# Altium PCB mother_noPour.PcbDoc
Units mm, origin at the board's own origin, x right, y up, seen from the top; angles counter-clockwise.
Board outline 232.5 x 170.6 mm, 2 copper layers (Top Layer, Bottom Layer); 95 components, 49 nets, 567 pads, 0 vias.
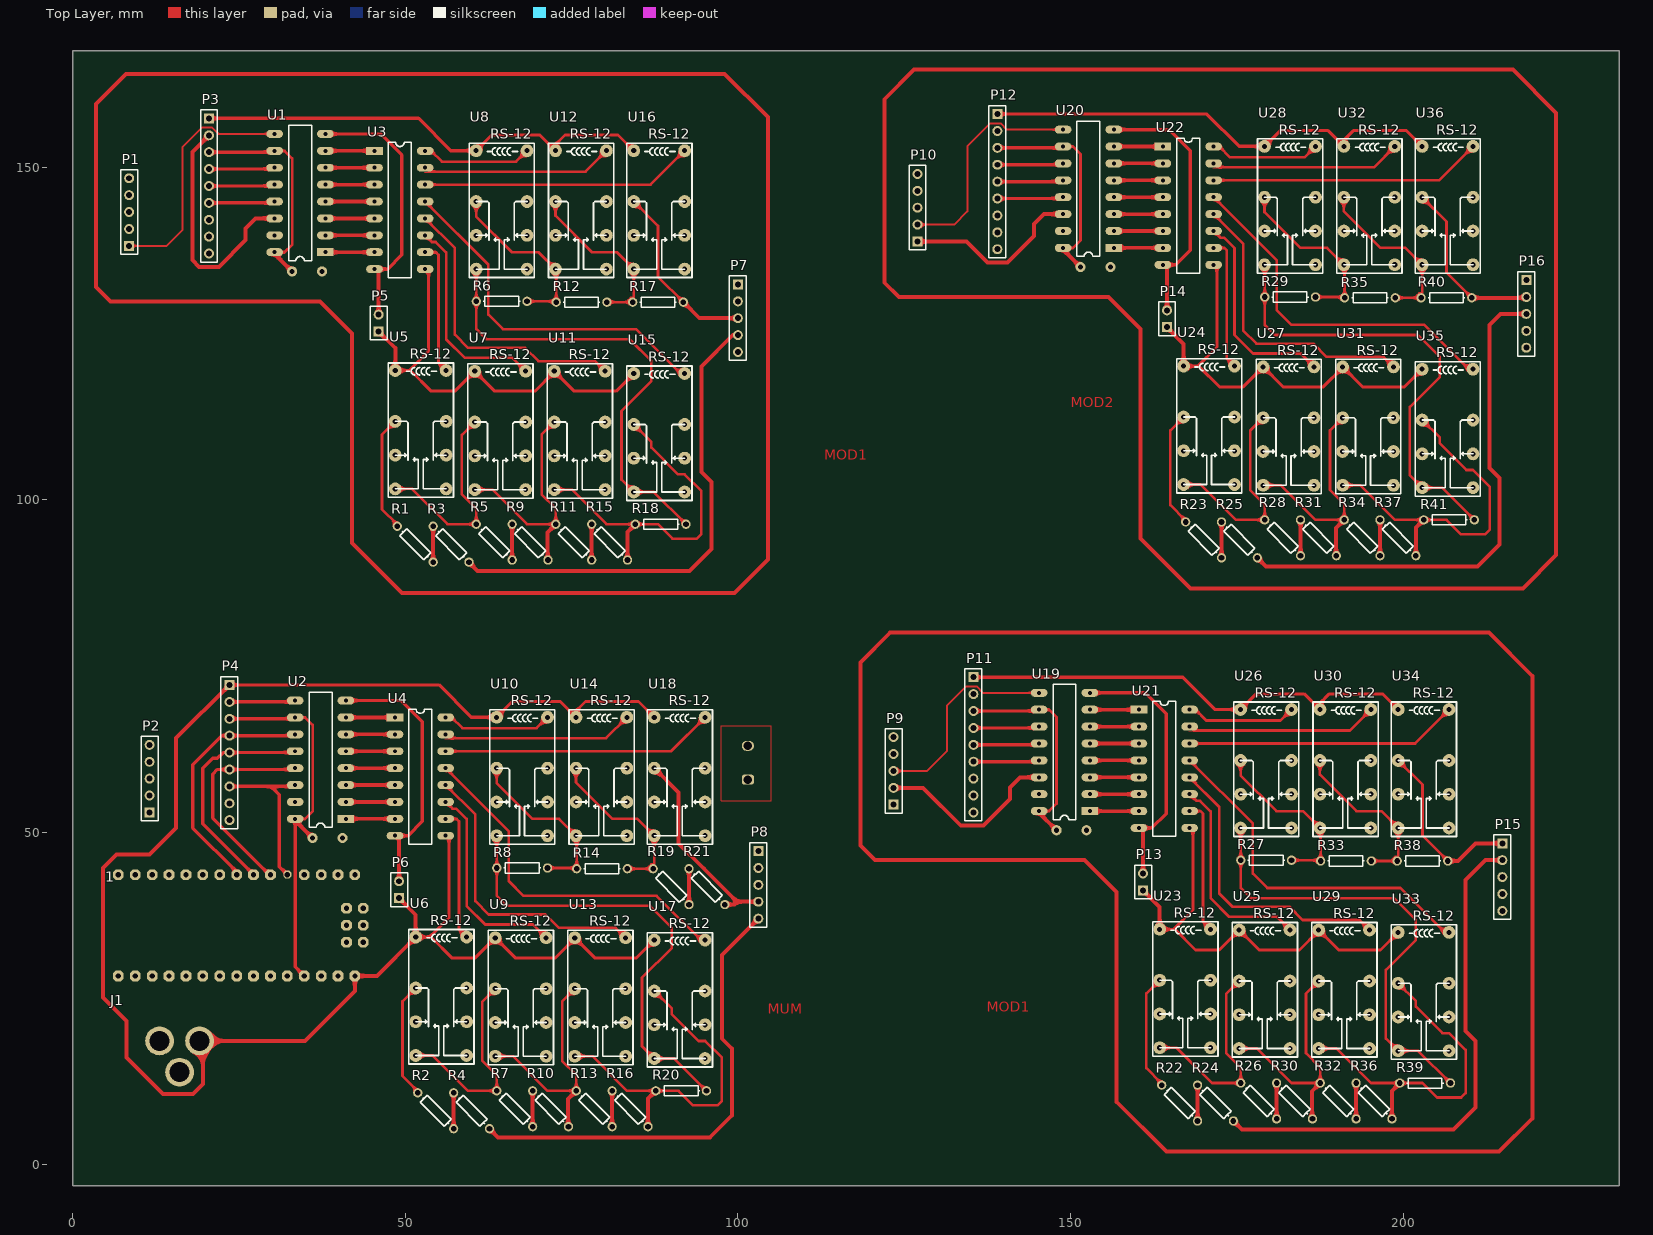
[diagram p0: Top Layer view]
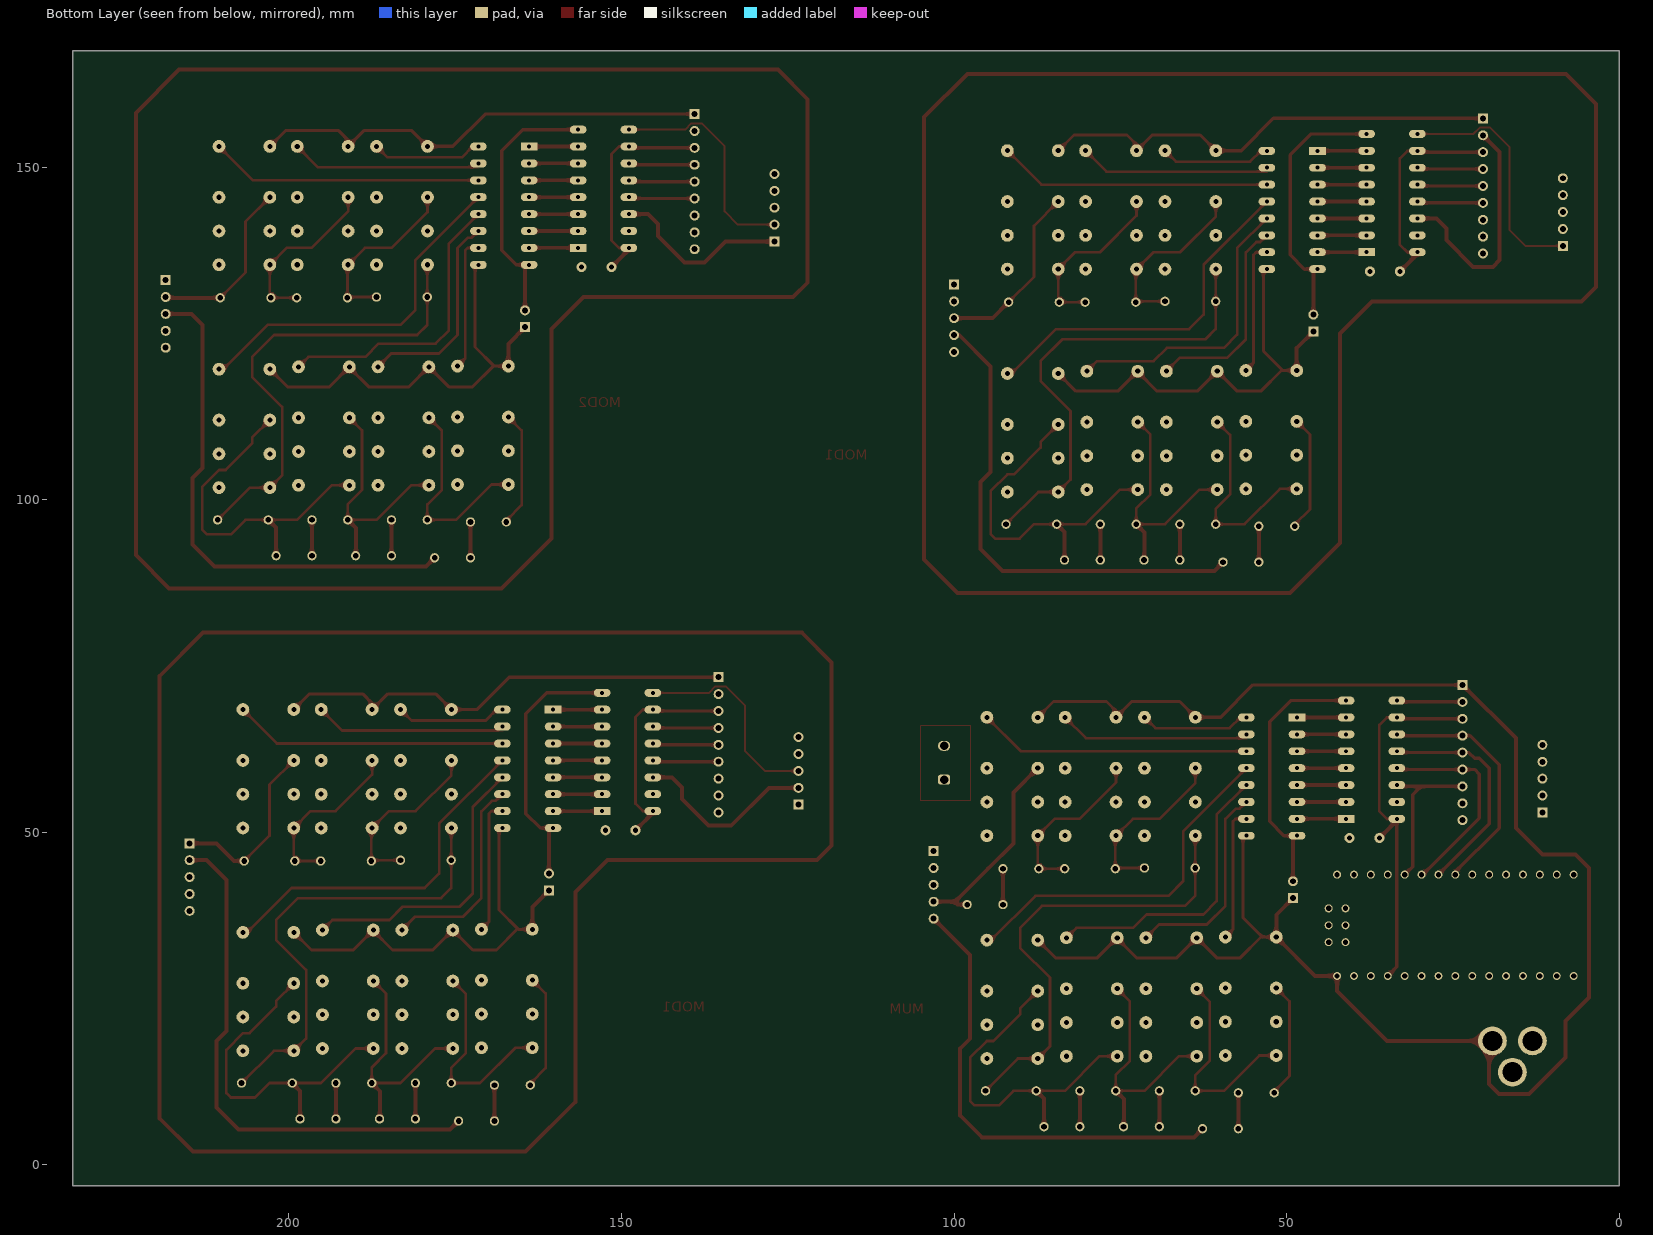
[diagram p1: Bottom Layer view, seen from below]

## Layer stack, top to bottom
Top Solder: solder mask 0.0102, Solder Resist, Dk 3.5
Top Layer: signal copper 0.0356
Dielectric 1: dielectric 0.32, FR-4, Dk 4.8
Bottom Layer: signal copper 0.0356
Bottom Solder: solder mask 0.0102, Solder Resist, Dk 3.5

## Board outline
0,-3.1 232.5,-3.1 232.5,167.5 0,167.5

## Design rules (kind name [scope] priority, off if disabled: settings)
Clearance Clearance_3 [InNamedPolygon('Top Layer-No Net')] p1: gap=0.4 ignorepadtopadclearanceinfootprint=FALSE except(0: Arc-Hole Track-Hole SMDPad-Hole THPad-Hole Via-Hole Fill-Hole Poly-Hole Region-Hole Text-Hole)
Clearance Clearance_2 [InNamedPolygon('Top Layer-12VGND')] p2: gap=0.38 ignorepadtopadclearanceinfootprint=FALSE except(0: Arc-Hole Track-Hole SMDPad-Hole THPad-Hole Via-Hole Fill-Hole Poly-Hole Region-Hole Text-Hole)
Clearance Clearance_1 [InNamedPolygon('Top Layer-No Net 4')] p3: gap=0.35 ignorepadtopadclearanceinfootprint=FALSE except(0: Arc-Hole Track-Hole SMDPad-Hole THPad-Hole Via-Hole Fill-Hole Poly-Hole Region-Hole Text-Hole)
Clearance widePoLY [InNamedPolygon('Top Layer-12VGND')] p4: gap=0.35 ignorepadtopadclearanceinfootprint=FALSE except(0: Arc-Hole Track-Hole SMDPad-Hole THPad-Hole Via-Hole Fill-Hole Poly-Hole Region-Hole Text-Hole)
Clearance [All] p5: gap=0.254 ignorepadtopadclearanceinfootprint=FALSE except(0: Arc-Hole Track-Hole SMDPad-Hole THPad-Hole Via-Hole Fill-Hole Poly-Hole Region-Hole Text-Hole)
PolygonConnect [All] p1: connectstyle=Relief reliefconductorwidth=0.254 reliefentries=4 polygonreliefangle="90 Angle" airgapwidth=0.254
RoutingVias [All] p1: holewidth=0.711 width=1.27 viastyle="Through Hole" minholewidth=0.711 minwidth=1.27 maxholewidth=0.711 maxwidth=1.27
SolderMaskExpansion [All] p1: expansion=0.102
Width [All] p1: maxlimit=0.6 minlimit=0.128 preferedwidth=0.254 bottomlayer_minwidth=0.254 bottomlayer_maxwidth=0.254 minimp=50.000000 maximp=50.000000 favimp=50.000000
30 further rules are at their usual default settings.

## Classes and differential pairs
component class module1: P4 P5 P6 P7 R2 R14 R20 U1 U3 U8 U10 U11 U12 U13 U15 U16
component class mother: 1 J1 P4 P5 P8 R2 R8 U2 U4 U6 U7 U9 U10 U14 U16 U17

## Components (designator, comment, footprint, x,y, rotation, side; value= is the part's Value field where it differs from the comment)
1 "Arduino Nano" NANO 33.548,38.565 r90 top
J1 "" POWER_JACK_PTH 5.378,18.645 r270 top
P1 "Header 5" HDR1X5 8.5,138.15 r90 top (schematic designator P5)
P2 "Header 5" HDR1X5 11.578,52.985 r90 top (schematic designator P8)
P3 "Header 9" HDR1X9 20.5,157.31 r270 top (schematic designator P4)
P4 "Header 9" HDR1X9 23.578,72.145 r270 top (schematic designator P1)
P5 "Header 2" HDR1X2 46,125.27 r90 top (schematic designator P7)
P6 "Header 2" HDR1X2 49.078,40.105 r90 top (schematic designator P3)
P7 "Header 5" HDR1X5 100,132.35 r270 top (schematic designator P6)
P8 "Header 5" HDR1X5 103.078,47.185 r270 top (schematic designator P2)
P9 "Header 5" HDR1X5 123.4,54.15 r90 top (schematic designator P5)
P10 "Header 5" HDR1X5 127,138.8 r90 top (schematic designator P5)
P11 "Header 9" HDR1X9 135.4,73.31 r270 top (schematic designator P4)
P12 "Header 9" HDR1X9 139,157.96 r270 top (schematic designator P4)
P13 "Header 2" HDR1X2 160.9,41.27 r90 top (schematic designator P7)
P14 "Header 2" HDR1X2 164.5,125.92 r90 top (schematic designator P7)
P15 "Header 5" HDR1X5 214.9,48.35 r270 top (schematic designator P6)
P16 "Header 5" HDR1X5 218.5,133 r270 top (schematic designator P6)
R1 "Res1" AXIAL-0.3 51.5,93.31 r315 top value=1K
R2 "Res1" AXIAL-0.3 54.578,8.145 r315 top value=1K (schematic designator R1)
R3 "Res1" AXIAL-0.3 56.888,93.31 r315 top value=1K (schematic designator R1)
R4 "Res1" AXIAL-0.3 59.966,8.145 r315 top value=1K (schematic designator R1)
R5 "Res1" AXIAL-0.3 63.375,93.616 r315 top value=1K (schematic designator R1)
R6 "Res1" AXIAL-0.3 64.5,129.81 r180 top value=1K (schematic designator R14)
R7 "Res1" AXIAL-0.3 66.454,8.451 r315 top value=1K (schematic designator R1)
R8 "Res1" AXIAL-0.3 67.578,44.645 r180 top value=1K (schematic designator R7)
R9 "Res1" AXIAL-0.3 68.764,93.616 r315 top value=1K (schematic designator R1)
R10 "Res1" AXIAL-0.3 71.842,8.451 r315 top value=1K (schematic designator R1)
R11 "Res1" AXIAL-0.3 75.325,93.616 r315 top value=1K (schematic designator R1)
R12 "Res1" AXIAL-0.3 76.5,129.69 r180 top value=1K (schematic designator R13)
R13 "Res1" AXIAL-0.3 78.404,8.451 r315 top value=1K (schematic designator R1)
R14 "Res1" AXIAL-0.3 79.578,44.525 r180 top value=1K (schematic designator R6)
R15 "Res1" AXIAL-0.3 80.714,93.616 r315 top value=1K (schematic designator R1)
R16 "Res1" AXIAL-0.3 83.792,8.451 r315 top value=1K (schematic designator R1)
R17 "Res1" AXIAL-0.3 88,129.69 r180 top value=1K (schematic designator R12)
R18 "Res1" AXIAL-0.3 88.391,96.31 r0 top value=1K (schematic designator R4)
R19 "Res1" AXIAL-0.3 89.962,41.831 r315 top value=1K (schematic designator R1)
R20 "Res1" AXIAL-0.3 91.47,11.145 r0 top value=1K (schematic designator R4)
R21 "Res1" AXIAL-0.3 95.35,41.831 r315 top value=1K (schematic designator R1)
R22 "Res1" AXIAL-0.3 166.4,9.31 r315 top value=1K (schematic designator R1)
R23 "Res1" AXIAL-0.3 170,93.96 r315 top value=1K (schematic designator R1)
R24 "Res1" AXIAL-0.3 171.788,9.31 r315 top value=1K (schematic designator R1)
R25 "Res1" AXIAL-0.3 175.388,93.96 r315 top value=1K (schematic designator R1)
R26 "Res1" AXIAL-0.3 178.275,9.616 r315 top value=1K (schematic designator R1)
R27 "Res1" AXIAL-0.3 179.4,45.81 r180 top value=1K (schematic designator R14)
R28 "Res1" AXIAL-0.3 181.875,94.266 r315 top value=1K (schematic designator R1)
R29 "Res1" AXIAL-0.3 183,130.46 r180 top value=1K (schematic designator R14)
R30 "Res1" AXIAL-0.3 183.664,9.616 r315 top value=1K (schematic designator R1)
R31 "Res1" AXIAL-0.3 187.264,94.266 r315 top value=1K (schematic designator R1)
R32 "Res1" AXIAL-0.3 190.225,9.616 r315 top value=1K (schematic designator R1)
R33 "Res1" AXIAL-0.3 191.4,45.69 r180 top value=1K (schematic designator R13)
R34 "Res1" AXIAL-0.3 193.825,94.266 r315 top value=1K (schematic designator R1)
R35 "Res1" AXIAL-0.3 195,130.34 r180 top value=1K (schematic designator R13)
R36 "Res1" AXIAL-0.3 195.614,9.616 r315 top value=1K (schematic designator R1)
R37 "Res1" AXIAL-0.3 199.214,94.266 r315 top value=1K (schematic designator R1)
R38 "Res1" AXIAL-0.3 202.9,45.69 r180 top value=1K (schematic designator R12)
R39 "Res1" AXIAL-0.3 203.291,12.31 r0 top value=1K (schematic designator R4)
R40 "Res1" AXIAL-0.3 206.5,130.34 r180 top value=1K (schematic designator R12)
R41 "Res1" AXIAL-0.3 206.891,96.96 r0 top value=1K (schematic designator R4)
U1 "74HC595" DIP16 38,137.19 r180 top (schematic designator U11)
U2 "74HC595" DIP16 41.078,52.025 r180 top (schematic designator U1)
U3 "ULN2003" DIP16 45.38,152.43 r0 top (schematic designator U10)
U4 "ULN2003" DIP16 48.458,67.265 r0 top (schematic designator U2)
U5 "RS12L" RS-12 47.45,120.545 r0 top (schematic designator U12)
U6 "RS12L" RS-12 50.528,35.38 r0 top (schematic designator U3)
U7 "RS12L" RS-12 59.4,120.435 r0 top (schematic designator U13)
U8 "RS12L" RS-12 59.61,153.58 r0 top (schematic designator U16)
U9 "RS12L" RS-12 62.478,35.27 r0 top (schematic designator U4)
U10 "RS12L" RS-12 62.688,68.415 r0 top (schematic designator U7)
U11 "RS12L" RS-12 71.35,120.435 r0 top (schematic designator U14)
U12 "RS12L" RS-12 71.531,153.58 r0 top (schematic designator U17)
U13 "RS12L" RS-12 74.428,35.27 r0 top (schematic designator U5)
U14 "RS12L" RS-12 74.61,68.415 r0 top (schematic designator U8)
U15 "RS12L" RS-12 83.3,120.085 r0 top
U16 "RS12L" RS-12 83.3,153.58 r0 top (schematic designator U18)
U17 "RS12L" RS-12 86.378,34.92 r0 top (schematic designator U6)
U18 "RS12L" RS-12 86.378,68.415 r0 top (schematic designator U9)
U19 "74HC595" DIP16 152.9,53.19 r180 top (schematic designator U11)
U20 "74HC595" DIP16 156.5,137.84 r180 top (schematic designator U11)
U21 "ULN2003" DIP16 160.28,68.43 r0 top (schematic designator U10)
U22 "ULN2003" DIP16 163.88,153.08 r0 top (schematic designator U10)
U23 "RS12L" RS-12 162.35,36.545 r0 top (schematic designator U12)
U24 "RS12L" RS-12 165.95,121.195 r0 top (schematic designator U12)
U25 "RS12L" RS-12 174.3,36.435 r0 top (schematic designator U13)
U26 "RS12L" RS-12 174.51,69.58 r0 top (schematic designator U16)
U27 "RS12L" RS-12 177.9,121.085 r0 top (schematic designator U13)
U28 "RS12L" RS-12 178.11,154.23 r0 top (schematic designator U16)
U29 "RS12L" RS-12 186.25,36.435 r0 top (schematic designator U14)
U30 "RS12L" RS-12 186.431,69.58 r0 top (schematic designator U17)
U31 "RS12L" RS-12 189.85,121.085 r0 top (schematic designator U14)
U32 "RS12L" RS-12 190.031,154.23 r0 top (schematic designator U17)
U33 "RS12L" RS-12 198.2,36.085 r0 top (schematic designator U15)
U34 "RS12L" RS-12 198.2,69.58 r0 top (schematic designator U18)
U35 "RS12L" RS-12 201.8,120.735 r0 top (schematic designator U15)
U36 "RS12L" RS-12 201.8,154.23 r0 top (schematic designator U18)

## Footprints (in the part's own frame and the unit in brackets; to place one, negate y for a bottom-side part, rotate by r counter-clockwise, add the part's x,y. Pads: shape width x height; smd on the part's side, far side on the other; paste and mask are expansions set on the pad)
AXIAL-0.3 [mm] "Axial Device, Thru-Hole; 2 Leads; 0.3 in Pin Spacing"
  round 1.4 hole 0.85: 1(-3.81,0) 2(3.81,0)
  silkscreen extent -2.77,-0.76 2.77,0.76
DIP16 [mm]
  rect 2.5x1.2 hole 0.6: 1(0,0)
  oval 2.5x1.2 hole 0.6: 2(0,-2.54) 3(0,-5.08) 4(0,-7.62) 5(0,-10.16) 6(0,-12.7) 7(0,-15.24) 8(0,-17.78) 9(7.62,-17.78) 10(7.62,-15.24) 11(7.62,-12.7) 12(7.62,-10.16) 13(7.62,-7.62) 14(7.62,-5.08) 15(7.62,-2.54) 16(7.62,0)
  silkscreen extent 2.08,-19.05 5.54,1.27
HDR1X2 [mm] "Connector; Header; 2 Position"
  rect 1.5x1.5 hole 0.9: 1(0,0)
  round 1.5 hole 0.9: 2(2.54,0)
  silkscreen extent -1.27,-1.27 3.81,1.27
HDR1X5 [mm] "Connector; Header; 5 Position"
  rect 1.5x1.5 hole 0.9: 1(0,0)
  round 1.5 hole 0.9: 2(2.54,0) 3(5.08,0) 4(7.62,0) 5(10.16,0)
  silkscreen extent -1.27,-1.27 11.43,1.27
HDR1X9 [mm] "Connector; Header; 9 Position"
  rect 1.5x1.5 hole 0.9: 1(0,0)
  round 1.5 hole 0.9: 2(2.54,0) 3(5.08,0) 4(7.62,0) 5(10.16,0) 6(12.7,0) 7(15.24,0) 8(17.78,0) 9(20.32,0)
  silkscreen extent -1.27,-1.27 21.59,1.27
NANO [mm]
  oct 1.6x1.6 / inner round 1.524 / far side round 1.2 hole 0.8: 3.3V(-10.16,24.13) 5V(-10.16,-1.27) A0(-10.16,19.05) A1(-10.16,16.51) A2(-10.16,13.97) A3(-10.16,11.43) A4(-10.16,8.89) A5(-10.16,6.35) A6(-10.16,3.81) A7(-10.16,1.27) AREF(-10.16,21.59) D3(5.08,3.81) D4(5.08,6.35) D5(5.08,8.89) D6(5.08,11.43) D7(5.08,13.97) D8(5.08,16.51) D9(5.08,19.05) D10(5.08,21.59) D11(5.08,24.13) D12(5.08,26.67) D13(-10.16,26.67) GND(-10.16,-6.35) GND1(5.08,-1.27) ICSP1(-5.08,-10.16) ICSP2(-5.08,-7.62) ICSP3(-2.54,-10.16) ICSP4(-2.54,-7.62) ICSP5(0,-10.16) ICSP6(0,-7.62) RAW(-10.16,-8.89) RST(-10.16,-3.81) RST1(5.08,-3.81) RX1(5.08,-6.35) TX0(5.08,-8.89)
  oct 1.2x1.2 / inner round 1.524 / far side round 1.2 hole 0.8: D2(5.08,1.27)
POWER_JACK_PTH [mil]
  round 170 / inner round 60 / far side round 170 hole 118: GND(0,303.15) GNDBREAK(185.04,421.26) PWR(0,539.37)
RS-12 [mm]
  round 1.924 hole 0.762: 1(1.05,-1.125) 4(1.05,-8.775) 6(1.05,-13.85) 8(1.05,-18.925) 9(8.7,-18.925) 11(8.7,-13.85) 13(8.7,-8.775) 16(8.7,-1.125)
  silkscreen extent 0,-20.2 9.8,0, body extent 3.05,-2.79 3.05,-2.79, height 0.25

## Part data
1: library part NANO, DeviceSetName=NANO, GateName_1=G$1, LibraryName=Arduino-clone, Package=NANO, SymbolName_1=NANO
J1: library part POWER_JACK, Package=POWER_JACK_PTH, DeviceSetName=POWER_JACK, GateName_1=G$1, LibraryName=SparkFun-Connectors, PROD_ID=CONN-08197, SymbolName_1=POWERJACK
P1 P2 P7 P8 P9 P10 P15 P16: "Header, 5-Pin", LatestRevisionDate=17-Jul-2002, LatestRevisionNote="Re-released for DXP Platform.", Publisher="Altium Limited"
P3 P4 P11 P12: "Header, 9-Pin", LatestRevisionDate=17-Jul-2002, LatestRevisionNote="Re-released for DXP Platform.", Publisher="Altium Limited"
P5 P6 P13 P14: "Header, 2-Pin", LatestRevisionDate=17-Jul-2002, LatestRevisionNote="Re-released for DXP Platform.", Publisher="Altium Limited"
R1 R2 R3 R4 R5 R6 R7 R8 R9 R10 R11 R12 R13 R14 R15 R16 R17 R18 R19 R20 R21 R22 R23 R24 R25 R26 R27 R28 R29 R30 R31 R32 R33 R34 R35 R36 R37 R38 R39 R40 R41: "Resistor", LatestRevisionDate=17-Jul-2002, LatestRevisionNote="Re-released for DXP Platform.", PackageDescription="Axial Device, Thru-Hole; 2 Leads; 0.3 in Pin Spacing", PackageReference=AXIAL-0.3, Published=8-Jun-2000, Publisher="Altium Limited"

## Free pads (board coordinates)
  round 1.524 hole 0.762: 17(33,134.31) 17(36.078,49.145) 17(147.9,50.31) 17(151.5,134.96) 18(37.5,134.31) 18(40.578,49.145) 18(152.4,50.31) 18(156,134.96)
  oval 1.824x1.524 hole 1.262: 19(101.5,63)
  rrect50% 1.824x1.524 hole 1.262: 20(101.5,57.915)

## Nets (pads, with @x,y where several pads share a name; then routed paths per layer and width w, separated by ;. In a path a pad name is that pad's centre, name@x,y a point inside that pad or via, vN(x,y) a via of type N, cw(c..) or ccw(c..) an arc to the next point about the centre after c; other vN are vias at no path point)
5V: 1.5V P3.3 P4.3 pad.17@33,134.31 pad.17@36.078,49.145 U1.10 U1.16 U2.10 U2.16 | length 89.6
  Top Layer w0.4: U1.16 31.88,137.19 33,138.31 33,151.31 31.88,152.43 U1.10 ; U2.10@33.378,67.185 U2.10 34.958,67.265 36.078,66.145 36.078,53.145 34.958,52.025 U2.16
  Top Layer w0.5: P3.3 U1.10@30.18,152.23 ; P4.3 33.258,67.065 U2.10@33.378,67.185 ; U2.16@33.458,51.765 33.458,29.765 1.5V
  Top Layer w0.6: U1.16@30.38,136.93 pad.17@33,134.31 ; U2.16 33.458,51.765 pad.17@36.078,49.145
12V: 1.RAW J1.PWR P3.1 P4.1 P5.1 P6.1 U3.9 U4.9 U5.1 U6.1 U7.1 U8.1 U9.1 U10.1 U11.1 U12.1 U13.1 U14.1 U15.1 U16.1 U17.1 U18.1 | length 401.7
  Top Layer w0.45: U5.1 50.61,119.42 53.5,122.31 U3.9@53.5,134.15 ; 50.79,119.42 53.9,116.31 57.45,116.31 U7.1 63.45,116.31 69.5,116.31 U11.1@72.4,119.21 ; U6.1 53.688,34.255 ; U4.9 56.578,48.985 56.578,37.145 53.688,34.255 ; U8.1 63.015,154.81 70.226,154.81 U12.1 ; U10.1 66.093,69.645 73.305,69.645 U14.1 75.66,68.226 77.078,69.645 85.073,69.645 U18.1 ; U11.1 75.4,116.31 81.7,116.31 U15.1 ; U12.1@72.581,153.391 74,154.81 81.995,154.81 U16.1 ; U17.1 84.778,31.145 78.478,31.145 U13.1 75.478,34.045 72.578,31.145 66.528,31.145 U9.1 60.528,31.145 56.978,31.145 53.868,34.255 53.688,34.255
  Top Layer w0.5: P3.1 52,157.31 56.855,152.455 U8.1 ; P4.1 55.078,72.145 59.933,67.29 U10.1
  Top Layer w0.6: J1.PWR J1.PWR@19.578,18.645 ; P4.1 15.578,64.145 15.578,50.645 11.578,46.645 6.578,46.645 4.578,44.645 4.578,25.145 8.078,21.645 8.078,16.145 13.578,10.645 18.078,10.645 19.578,12.145 J1.PWR@19.578,18.645 ; P5.1 48.5,122.77 U5.1 ; P6.1 51.578,37.605 U6.1 45.728,28.405 1.RAW 42.438,26.145 34.938,18.645 J1.PWR@19.578,18.645
12VGND: 1.GND J1.GND P1.4 P1.5 P2.4 P2.5 P3.8 P3.9 P4.8 P4.9 P5.2 P6.2 pad.18@40.578,49.145 U1.8 U2.8 U3.8 U4.8 | length 79
  Top Layer w0.5: U1.8 46.34,154.97 49.5,151.81 49.5,136.81 47.34,134.65 U3.8 ; U2.8 49.418,69.805 52.578,66.645 52.578,51.645 50.418,49.485 U4.8
  Top Layer w0.6: P5.2 46,134.03 ; U4.8 49.078,48.865 P6.2
CLK: 1.D5 P3.4 P4.4 U1.11 U2.11 | length 46.2
  Top Layer w0.5: P3.4 U1.11@30.18,149.69 ; 1.D5 24.658,44.065 18.078,50.645 18.078,60.145 22.458,64.525 P4.4 33.258,64.525 U2.11@33.378,64.645
  Top Layer w0.55: U2.11@33.378,64.645 U2.11
DATA: 1.D2 P3.7 P4.7 U2.14 | length 24.2
  Top Layer w0.5: P4.7 29.818,56.905 ; 1.D2 31.078,44.845 31.078,55.645 29.818,56.905 ; U2.14@33.378,57.025 33.258,56.905 29.818,56.905
  Top Layer w0.55: U2.14@33.378,57.025 U2.14
DAUG1Q*: P1.1 P2.1 U1.9 | length 37
  Top Layer w0.3: P1.1 14.15,138.15 16.5,140.5 16.5,153 19.424,155.924 20.978,155.924 21.932,154.97 U1.9
DAUG2Q*: P1.2 P2.2
DAUG3Q*: P1.3 P2.3
EN: 1.D3 P3.6 P4.6 U1.13 U2.13 | length 41.2
  Top Layer w0.5: P3.6 U1.13@30.18,144.61 ; 1.D3 29.578,43.645 21.078,52.145 21.078,58.745 21.778,59.445 P4.6 33.258,59.445 U2.13@33.378,59.565
  Top Layer w0.55: U2.13@33.378,59.565 U2.13
LATCH: 1.D4 P3.5 P4.5 U1.12 U2.12 | length 43.8
  Top Layer w0.5: P3.5 U1.12@30.18,147.15 ; 1.D4 19.578,51.265 19.578,59.645 21.078,61.145 21.778,61.145 22.618,61.985 P4.5 33.258,61.985 U2.12@33.378,62.105
  Top Layer w0.55: U2.12@33.378,62.105 U2.12
MUMQ*: P3.2 P4.2 U1.14 U2.9 | length 46.6
  Top Layer w0.5: P4.2 33.258,69.605 U2.9
  Top Layer w0.6: P3.2 18,152.27 18,136 19,135 22,135 26,139 26,140.77 27.5,142.27 U1.14
NetR1_2: R2.2 R7.1 U6.8 U9.4 | length 31.4
  Top Layer w0.4: U6.8 54.12,16.455 59.43,11.145 R7.1 63.76,13.464 61.578,15.645 61.578,24.545 U9.4
NetR2_2: R13.1 U9.8 U13.4 | length 31.4
  Top Layer w0.4: U9.8 66.18,16.345 71.38,11.145 R13.1 75.71,13.514 73.578,15.645 73.578,24.595 U13.4
NetR3_2: R20.1 U13.8 U17.4 | length 46.7
  Top Layer w0.4: U13.8 78.13,16.345 83.33,11.145 R20.1 91.078,11.145 93.255,8.968 96.901,8.968 97.578,9.645 97.578,16.145 95.078,18.645 94.078,18.645 90.078,22.645 90.078,23.495 U17.4
NetR4_2: R8.2 R20.2 U10.8 U17.8 | length 68.6
  Top Layer w0.4: U10.8@63.738,48.601 63.768,48.601 R8.2 63.768,40.455 65.278,38.945 86.778,38.945 90.078,35.645 90.078,32.645 85.578,28.145 85.578,17.845 U17.8 90.43,15.995 R20.2
NetR5_2: R14.1 R19.1 U14.4 U18.8 | length 25.9
  Top Layer w0.4: U14.4 75.66,57.514 81.148,52.025 84.893,52.025 U18.8 87.428,45.298 R19.1@87.31,45.179 ; R14.1 86.614,44.525 86.614,44.796 86.997,45.179 R19.1@87.268,45.179 ; R19.1 R19.1@87.31,44.525
NetR6_2: R8.1 R14.2 U10.4 U14.8 | length 26.9
  Top Layer w0.4: U10.4 63.738,57.405 69.118,52.025 73.125,52.025 U14.8 75.768,49.381 R14.2 75.648,44.645 R8.1
NetR8_2: R5.1 U5.8 U7.4 | length 31.4
  Top Layer w0.4: U5.8 51.041,101.62 56.351,96.31 R5.1 60.681,98.629 58.5,100.81 58.5,109.71 U7.4
NetR9_2: R9.2 R11.1 U7.8 U11.4 | length 37.2
  Top Layer w0.4: U7.8 63.101,101.51 68.301,96.31 R11.1 72.631,98.679 70.5,100.81 70.5,109.76 U11.4
  Top Layer w0.6: R9.2@71.4,90.98 71.4,95.079 R11.1
NetR10_2: R15.2 R18.1 U11.8 U15.4 | length 58.6
  Top Layer w0.4: U11.8 75.051,101.51 80.251,96.31 R18.1 88,96.31 90.177,94.133 93.823,94.133 94.5,94.81 94.5,101.31 ; U15.4 87,108.66 87,107.81 91,103.81 92,103.81 94.5,101.31 ; 94.5,95.31 94.5,101.31
  Top Layer w0.6: R15.2 83.408,95.136 R18.1
NetR11_2: R6.2 U15.8 U16.8 | length 25.6
  Top Layer w0.4: 72.581,144.805 72.581,142.679 78.07,137.19 81.815,137.19 U16.8 84.35,130.463 84.231,130.344 ; 80.31,129.69 83.536,129.69 ; 83.536,129.961 83.919,130.344 84.19,130.344
NetR12_2: R12.1 R17.2 R18.2 U8.8 U12.4 | length 68.6
  Top Layer w0.4: U8.8@60.69,133.766 60.69,129.81 60.69,125.62 62.2,124.11 83.7,124.11 87,120.81 87,117.81 82.5,113.31 82.5,103.01 84.35,101.16 87.351,101.16 R18.2
NetR13_2: R6.1 R12.2 U12.8 U16.4
NetU1_1: U2.1 U4.7 | length 7.4
  Top Layer w0.55: U2.1 U4.7
NetU1_2: U2.2 U4.6 | length 7.4
  Top Layer w0.55: U2.2 U4.6
NetU1_3: U2.3 U4.5 | length 7.4
  Top Layer w0.55: U2.3 U4.5
NetU1_4: U2.4 U4.4 | length 7.4
  Top Layer w0.55: U2.4 U4.4
NetU1_5: U2.5 U4.3 | length 7.4
  Top Layer w0.55: U2.5 U4.3
NetU1_6: U2.6 U4.2 | length 7.4
  Top Layer w0.55: U2.6 U4.2
NetU1_7: U2.7 U4.1 | length 7.4
  Top Layer w0.55: U2.7 U4.1
NetU10_1: U1.7 U3.1 | length 7.4
  Top Layer w0.55: U1.7 U3.1
NetU10_2: U1.6 U3.2 | length 7.4
  Top Layer w0.55: U1.6 U3.2
NetU10_3: U1.5 U3.3 | length 7.4
  Top Layer w0.55: U1.5 U3.3
NetU10_4: U1.4 U3.4 | length 7.4
  Top Layer w0.55: U1.4 U3.4
NetU10_5: U1.3 U3.5 | length 7.4
  Top Layer w0.55: U1.3 U3.5
NetU10_6: U1.2 U3.6 | length 7.4
  Top Layer w0.55: U1.2 U3.6
NetU10_7: U1.1 U3.7 | length 7.4
  Top Layer w0.55: U1.1 U3.7
T1: U3.10 U4.10 U5.16 U6.16 | length 40
  Top Layer w0.4: U3.10 54.62,137.19 55,136.81 55,120.57 U5.16 ; U4.10 57.698,52.025 58.078,51.645 58.078,35.405 U6.16
T2: U3.11 U4.11 U7.16 U9.16 | length 62.4
  Top Layer w0.4: U3.11 54,138.73 54.58,138.73 56.15,137.16 56.15,124.11 58.95,121.31 66.1,121.31 U7.16 ; U4.11 57.078,53.565 57.658,53.565 59.228,51.995 59.228,38.945 62.028,36.145 69.178,36.145 U9.16
T3: U3.12 U4.12 U11.16 U13.16 | length 88.4
  Top Layer w0.4: U3.12 57.45,137.82 57.45,124.81 59.45,122.81 68,122.81 70,120.81 78.55,120.81 U11.16 ; U4.12 60.528,52.655 60.528,39.645 62.528,37.645 71.078,37.645 73.078,35.645 81.628,35.645 U13.16
T4: U3.13 U4.13 U15.16 U17.16 | length 107.6
  Top Layer w0.4: U3.13 62.5,135.31 62.5,127.81 64.69,125.62 84.69,125.62 U15.16@91.35,118.96 ; U4.13 65.578,50.145 65.578,42.645 67.768,40.455 87.768,40.455 94.428,33.795 U17.16
T5: U3.14 U4.14 U8.16 U18.16 | length 98
  Top Layer w0.4: U3.14 86.895,147.35 92,152.455 ; 53.88,152.43 55.5,150.81 66.665,150.81 U8.16 ; U4.14 89.973,62.185 U18.16
T6: U3.15 U4.15 U12.16 U14.16 | length 56.7
  Top Layer w0.4: U3.15@53.58,149.31 77.086,149.31 U12.16 ; U4.15 56.658,64.145 80.165,64.145 U14.16
T7: U3.16 U4.16 U10.16 U16.16 | length 16.7
  Top Layer w0.4: U4.16 56.958,67.265 58.578,65.645 69.743,65.645 U10.16
TERMA: P7.5 P8.5 R2.1 U6.4 | length 48.5
  Top Layer w0.4: U6.4 49.578,24.605 49.578,13.376 R2.1@51.81,11.145
  Top Layer w0.6: 99.078,8.645 99.078,17.472 97.578,18.972 97.578,31.525 P8.5
TERMB: P7.4 P8.4 R1.1 R3.2 U5.4 U18.4 | length 128.6
  Top Layer w0.4: U5.4 46.5,109.77 46.5,98.541 R1.1@48.731,96.31
  Top Layer w0.6: R3.2 60.888,89.31 92.694,89.31 96,92.616 96,94.133 ; U18.4 91.078,55.99 91.078,48.335 94.888,44.525 99.848,39.565 P8.4 ; P7.4 99.23,124.73 94.5,120 94.5,104.137 96,102.637 ; 96,102.637 96,93.81 96,102.637
TERMC: P7.3 P8.3 R17.1 U8.4 | length 53.9
  Top Layer w0.4: U8.4 60.66,142.57 66.04,137.19 70.046,137.19 72.581,134.655 ; 68.31,129.81 72.57,129.81 ; 72.69,129.69 72.69,134.546 ; 84.35,144.805 88,141.155 88,133.5 R17.1
  Top Layer w0.6: R17.1 94.23,127.27 P7.3
TERMD: P7.2 P8.2
TERME: P7.1 P8.1
pads on no net: 1.3.3V 1.A0 1.A1 1.A2 1.A3 1.A4 1.A5 1.A6 1.A7 1.AREF 1.D6 1.D7 1.D8 1.D9 1.D10 1.D11 1.D12 1.D13 1.GND1 1.ICSP1 1.ICSP2 1.ICSP3 1.ICSP4 1.ICSP5 1.ICSP6 1.RST 1.RST1 1.RX1 1.TX0 J1.GNDBREAK P9.1 P9.2 P9.3 P9.4 P9.5 P10.1 P10.2 P10.3 P10.4 P10.5 P11.1 P11.2 P11.3 P11.4 P11.5 P11.6 P11.7 P11.8 P11.9 P12.1 P12.2 P12.3 P12.4 P12.5 P12.6 P12.7 P12.8 P12.9 P13.1 P13.2 P14.1 P14.2 P15.1 P15.2 P15.3 P15.4 P15.5 P16.1 P16.2 P16.3 P16.4 P16.5 R1.2 R3.1 R4.1 R4.2 R5.2 R7.2 R9.1 R10.1 R10.2 R11.2 R13.2 R15.1 R16.1 R16.2 R19.2 R21.1 R21.2 R22.1 R22.2 R23.1 R23.2 R24.1 R24.2 R25.1 R25.2 R26.1 R26.2 R27.1 R27.2 R28.1 R28.2 R29.1 R29.2 R30.1 R30.2 R31.1 R31.2 R32.1 R32.2 R33.1 R33.2 R34.1 R34.2 R35.1 R35.2 R36.1 R36.2 R37.1 R37.2 R38.1 R38.2 R39.1 R39.2 R40.1 R40.2 R41.1 R41.2 U1.15 U2.15 U5.6 U5.9 U5.11 U5.13 U6.6 U6.9 U6.11 U6.13 U7.6 U7.9 U7.11 U7.13 U8.6 U8.9 U8.11 U8.13 U9.6 U9.9 U9.11 U9.13 U10.6 U10.9 U10.11 U10.13 U11.6 U11.9 U11.11 U11.13 U12.6 U12.9 U12.11 U12.13 U13.6 U13.9 U13.11 U13.13 U14.6 U14.9 U14.11 U14.13 U15.6 U15.9 U15.11 U15.13 U16.6 U16.9 U16.11 U16.13 U17.6 U17.9 U17.11 U17.13 U18.6 U18.9 U18.11 U18.13 U19.1 U19.2 U19.3 U19.4 U19.5 U19.6 U19.7 U19.8 U19.9 U19.10 U19.11 U19.12 U19.13 U19.14 U19.15 U19.16 U20.1 U20.2 U20.3 U20.4 U20.5 U20.6 U20.7 U20.8 U20.9 U20.10 U20.11 U20.12 U20.13 U20.14 U20.15 U20.16 U21.1 U21.2 U21.3 U21.4 U21.5 U21.6 U21.7 U21.8 U21.9 U21.10 U21.11 U21.12 U21.13 U21.14 U21.15 U21.16 U22.1 U22.2 U22.3 U22.4 U22.5 U22.6 U22.7 U22.8 U22.9 U22.10 U22.11 U22.12 U22.13 U22.14 U22.15 U22.16 U23.1 U23.4 U23.6 U23.8 U23.9 U23.11 U23.13 U23.16 U24.1 U24.4 U24.6 U24.8 U24.9 U24.11 U24.13 U24.16 U25.1 U25.4 U25.6 U25.8 U25.9 U25.11 U25.13 U25.16 U26.1 U26.4 U26.6 U26.8 U26.9 U26.11 U26.13 U26.16 U27.1 U27.4 U27.6 U27.8 U27.9 U27.11 U27.13 U27.16 U28.1 U28.4 U28.6 U28.8 U28.9 U28.11 U28.13 U28.16 U29.1 U29.4 U29.6 U29.8 U29.9 U29.11 U29.13 U29.16 U30.1 U30.4 U30.6 U30.8 U30.9 U30.11 U30.13 U30.16 U31.1 U31.4 U31.6 U31.8 U31.9 U31.11 U31.13 U31.16 U32.1 U32.4 U32.6 U32.8 U32.9 U32.11 U32.13 U32.16 U33.1 U33.4 U33.6 U33.8 U33.9 U33.11 U33.13 U33.16 U34.1 U34.4 U34.6 U34.8 U34.9 U34.11 U34.13 U34.16 U35.1 U35.4 U35.6 U35.8 U35.9 U35.11 U35.13 U35.16 U36.1 U36.4 U36.6 U36.8 U36.9 U36.11 U36.13 U36.16
copper on no net: | length 3075.5
  Top Layer w0.125: 97.5,54.73 105,54.73 105,66 97.5,66 97.5,54.73
  Top Layer w0.3: 123.4,59.23 128.44,59.23 131.4,62.19 131.4,69 134.324,71.924 135.878,71.924 136.832,70.97 145.28,70.97 ; 127,141.34 132.5,141.34 134.5,143.34 134.5,153.15 137.924,156.574 139.478,156.574 140.432,155.62 148.88,155.62
  Top Layer w0.4: 145.28,53.19 146.78,53.19 147.9,54.31 147.9,67.31 146.78,68.43 145.28,68.43 ; 148.88,137.84 150.38,137.84 151.5,138.96 151.5,151.96 150.38,153.08 148.88,153.08 ; 163.4,17.62 165.941,17.62 171.251,12.31 175.581,12.31 175.581,14.629 173.4,16.81 173.4,25.71 175.35,27.66 ; 163.4,27.77 161.4,25.77 161.4,14.541 163.631,12.31 ; 167,102.27 169.541,102.27 174.851,96.96 179.181,96.96 179.181,99.279 177,101.46 177,110.36 178.95,112.31 ; 167,112.42 165,110.42 165,99.191 167.231,96.96 ; 167.9,53.19 169.52,53.19 169.9,52.81 169.9,36.57 171.05,35.42 ; 167.9,55.73 168.9,54.73 169.48,54.73 171.05,53.16 171.05,40.11 173.85,37.31 181,37.31 183,35.31 ; 167.9,58.27 172.35,53.82 172.35,40.81 174.35,38.81 182.9,38.81 184.9,36.81 193.45,36.81 194.95,35.31 ; 167.9,60.81 177.4,51.31 177.4,43.81 179.59,41.62 199.59,41.62 206.25,34.96 ; 167.9,63.35 201.795,63.35 206.9,68.455 ; 168.48,65.31 191.986,65.31 195.131,68.455 ; 168.78,68.43 170.4,66.81 181.565,66.81 183.21,68.455 ; 171.5,137.84 173.12,137.84 173.5,137.46 173.5,121.22 174.65,120.07 ; 171.5,140.38 172.5,139.38 173.08,139.38 174.65,137.81 174.65,124.76 177.45,121.96 184.6,121.96 186.6,119.96 ; 171.5,142.92 175.95,138.47 175.95,125.46 177.95,123.46 186.5,123.46 188.5,121.46 197.05,121.46 198.55,119.96 ; 171.5,145.46 181,135.96 181,128.46 183.19,126.27 203.19,126.27 209.85,119.61 ; 171.5,148 205.395,148 210.5,153.105 ; 172.08,149.96 195.586,149.96 198.731,153.105 ; 172.38,153.08 174,151.46 185.165,151.46 186.81,153.105 ; 175.35,17.51 178.001,17.51 183.201,12.31 187.531,12.31 187.531,14.679 185.4,16.81 185.4,25.76 187.3,27.66 ; 175.56,60.805 175.56,58.57 180.94,53.19 184.946,53.19 187.481,50.655 ; 175.59,49.766 175.59,45.81 175.59,41.62 177.1,40.11 198.6,40.11 201.9,36.81 201.9,33.81 197.4,29.31 197.4,19.01 199.25,17.16 202.251,17.16 207.101,12.31 ; 178.95,102.16 181.601,102.16 186.801,96.96 191.131,96.96 191.131,99.329 189,101.46 189,110.41 190.9,112.31 ; 179.16,145.455 179.16,143.22 184.54,137.84 188.546,137.84 191.081,135.305 ; 179.19,134.416 179.19,130.46 179.19,126.27 180.7,124.76 202.2,124.76 205.5,121.46 205.5,118.46 201,113.96 201,103.66 202.85,101.81 205.851,101.81 210.701,96.96 ; 183.21,45.81 187.47,45.81 ; 186.81,130.46 191.07,130.46 ; 187.3,17.51 189.951,17.51 195.151,12.31 199.481,12.31 202.9,12.31 205.077,10.133 208.723,10.133 209.4,10.81 209.4,17.31 206.9,19.81 205.9,19.81 201.9,23.81 201.9,24.66 199.25,27.31 ; 187.481,60.805 187.481,58.679 192.97,53.19 196.715,53.19 199.25,50.655 199.25,46.463 199.131,46.344 ; 187.59,45.69 187.59,50.546 ; 190.9,102.16 193.551,102.16 198.751,96.96 203.081,96.96 206.5,96.96 208.677,94.783 212.323,94.783 213,95.46 213,101.96 210.5,104.46 209.5,104.46 205.5,108.46 205.5,109.31 202.85,111.96 ; 191.081,145.455 191.081,143.329 196.57,137.84 200.315,137.84 202.85,135.305 202.85,131.113 202.731,130.994 ; 191.19,130.34 191.19,135.196 ; 195.21,45.69 198.436,45.69 ; 198.436,45.961 198.819,46.344 199.09,46.344 ; 198.81,130.34 202.036,130.34 ; 199.25,60.805 202.9,57.155 202.9,49.5 206.71,45.69 ; 202.036,130.611 202.419,130.994 202.69,130.994 ; 202.85,145.455 206.5,141.805 206.5,134.15 210.31,130.34
  Top Layer w0.45: 163.4,35.42 165.51,35.42 168.4,38.31 168.4,50.15 ; 165.69,35.42 168.8,32.31 172.35,32.31 175.35,35.31 178.35,32.31 184.4,32.31 187.3,35.21 ; 167,120.07 169.11,120.07 172,122.96 172,134.8 ; 169.29,120.07 172.4,116.96 175.95,116.96 178.95,119.96 181.95,116.96 188,116.96 190.9,119.86 ; 175.56,68.455 177.915,70.81 185.126,70.81 187.481,68.455 ; 179.16,153.105 181.515,155.46 188.726,155.46 191.081,153.105 ; 187.3,35.31 190.3,32.31 196.6,32.31 199.25,34.96 ; 187.481,69.391 188.9,70.81 196.895,70.81 199.25,68.455 ; 190.9,119.96 193.9,116.96 200.2,116.96 202.85,119.61 ; 191.081,154.041 192.5,155.46 200.495,155.46 202.85,153.105
  Top Layer w0.5: 135.4,60.61 145.08,60.61 ; 135.4,63.15 145.08,63.15 ; 135.4,65.69 145.08,65.69 ; 135.4,68.23 145.08,68.23 ; 135.4,73.31 166.9,73.31 171.755,68.455 175.56,68.455 ; 139,145.26 148.68,145.26 ; 139,147.8 148.68,147.8 ; 139,150.34 148.68,150.34 ; 139,152.88 148.68,152.88 ; 139,157.96 170.5,157.96 175.355,153.105 179.16,153.105 ; 152.9,70.97 161.24,70.97 164.4,67.81 164.4,52.81 162.24,50.65 160.28,50.65 ; 156.5,155.62 164.84,155.62 168,152.46 168,137.46 165.84,135.3 163.88,135.3
  Top Layer w0.55: 152.9,53.19 160.28,53.19 ; 152.9,55.73 160.28,55.73 ; 152.9,58.27 160.28,58.27 ; 152.9,60.81 160.28,60.81 ; 152.9,63.35 160.28,63.35 ; 152.9,65.89 160.28,65.89 ; 152.9,68.43 160.28,68.43 ; 156.5,137.84 163.88,137.84 ; 156.5,140.38 163.88,140.38 ; 156.5,142.92 163.88,142.92 ; 156.5,145.46 163.88,145.46 ; 156.5,148 163.88,148 ; 156.5,150.54 163.88,150.54 ; 156.5,153.08 163.88,153.08
  Top Layer w0.6: 5.69,129.81 3.5,132 3.5,159.5 8,164 98,164 104.5,157.5 104.5,91 99.5,86 49.5,86 42,93.5 42,125 37.19,129.81 6,129.81 ; 54.194,90.616 54.194,96.004 ; 57.272,5.451 57.272,10.839 ; 62.66,5.451 63.966,4.145 95.772,4.145 99.078,7.451 99.078,8.968 ; 66.07,90.922 66.07,96.31 ; 69.148,5.757 69.148,11.145 ; 74.478,5.815 74.478,9.914 75.71,11.145 ; 78.02,90.922 78.02,96.31 ; 81.098,5.757 81.098,11.145 ; 86.486,5.757 86.486,9.971 87.66,11.145 ; 92.656,39.137 92.656,44.525 ; 98.044,39.137 99.42,39.137 99.848,39.565 ; 120.59,45.81 118.4,48 118.4,75.5 122.9,80 212.9,80 219.4,73.5 219.4,7 214.4,2 164.4,2 156.9,9.5 156.9,41 152.09,45.81 120.9,45.81 ; 123.4,56.69 127.81,56.69 133.5,51 136.9,51 140.9,55 140.9,56.77 142.4,58.27 145.28,58.27 ; 124.19,130.46 122,132.65 122,160.15 126.5,164.65 216.5,164.65 223,158.15 223,91.65 218,86.65 168,86.65 160.5,94.15 160.5,125.65 155.69,130.46 124.5,130.46 ; 127,138.8 134.39,138.8 137.54,135.65 140.5,135.65 144.5,139.65 144.5,141.42 146,142.92 148.88,142.92 ; 145.28,52.93 147.9,50.31 ; 148.88,137.58 151.5,134.96 ; 160.9,41.27 163.4,38.77 163.4,35.42 ; 160.9,43.81 160.9,50.03 ; 164.5,125.92 167,123.42 167,120.07 ; 164.5,128.46 164.5,134.68 ; 169.094,6.616 169.094,12.004 ; 172.694,91.266 172.694,96.654 ; 174.482,6.616 175.788,5.31 207.594,5.31 210.9,8.616 210.9,10.133 ; 178.082,91.266 179.388,89.96 211.194,89.96 214.5,93.266 214.5,94.783 ; 180.97,6.922 180.97,12.31 ; 184.57,91.572 184.57,96.96 ; 186.3,6.98 186.3,11.079 187.531,12.31 ; 189.9,91.63 189.9,95.729 191.131,96.96 ; 192.92,6.922 192.92,12.31 ; 196.52,91.572 196.52,96.96 ; 198.308,6.922 198.308,11.136 199.481,12.31 ; 201.908,91.572 201.908,95.786 203.081,96.96 ; 206.71,45.69 208.24,45.69 210.9,48.35 214.9,48.35 ; 210.31,130.34 218.38,130.34 218.5,130.46 ; 210.9,9.81 210.9,18.637 209.4,20.137 209.4,42.81 212.4,45.81 214.9,45.81 ; 213,120.5 213,126.27 214.65,127.92 218.5,127.92 ; 213,120.65 213,104.787 214.5,103.287 214.5,94.46

## Other copper
Top Layer:
  text "MOD2" at 150,113.92 h1.52
  text "MOD1" at 113,106 h1.52
  text "MOD1" at 137.4,23 h1.52
  text "MUM" at 104.5,22.695 h1.52

## Text inside footprints (layer, text, board x,y; h text height)
U5: Top Overlay "RS-12" at 50.65,121.195 h1.52
U6: Top Overlay "RS-12" at 53.728,36.03 h1.52
U7: Top Overlay "RS-12" at 62.6,121.085 h1.52
U8: Top Overlay "RS-12" at 62.81,154.23 h1.52
U9: Top Overlay "RS-12" at 65.678,35.92 h1.52
U10: Top Overlay "RS-12" at 65.888,69.065 h1.52
U11: Top Overlay "RS-12" at 74.55,121.085 h1.52
U12: Top Overlay "RS-12" at 74.731,154.23 h1.52
U13: Top Overlay "RS-12" at 77.628,35.92 h1.52
U14: Top Overlay "RS-12" at 77.81,69.065 h1.52
U15: Top Overlay "RS-12" at 86.5,120.735 h1.52
U16: Top Overlay "RS-12" at 86.5,154.23 h1.52
U17: Top Overlay "RS-12" at 89.578,35.57 h1.52
U18: Top Overlay "RS-12" at 89.578,69.065 h1.52
U23: Top Overlay "RS-12" at 165.55,37.195 h1.52
U24: Top Overlay "RS-12" at 169.15,121.845 h1.52
U25: Top Overlay "RS-12" at 177.5,37.085 h1.52
U26: Top Overlay "RS-12" at 177.71,70.23 h1.52
U27: Top Overlay "RS-12" at 181.1,121.735 h1.52
U28: Top Overlay "RS-12" at 181.31,154.88 h1.52
U29: Top Overlay "RS-12" at 189.45,37.085 h1.52
U30: Top Overlay "RS-12" at 189.631,70.23 h1.52
U31: Top Overlay "RS-12" at 193.05,121.735 h1.52
U32: Top Overlay "RS-12" at 193.231,154.88 h1.52
U33: Top Overlay "RS-12" at 201.4,36.735 h1.52
U34: Top Overlay "RS-12" at 201.4,70.23 h1.52
U35: Top Overlay "RS-12" at 205,121.385 h1.52
U36: Top Overlay "RS-12" at 205,154.88 h1.52